# Altium PCB esp32c3phils.PcbDoc (part 2 of 3)
Units mil, origin at the board's own origin, x right, y up, seen from the top; angles counter-clockwise.
Board outline 2756.04 x 1955.51 mil, 6 copper layers (Top Layer, Layer 1, Layer 3, Layer 4, Layer 2, Bottom Layer), stack 54.512 mil thick; 66 components, 48 nets, 263 pads, 93 vias.
Unrouted connection lines stored in the file: 25.
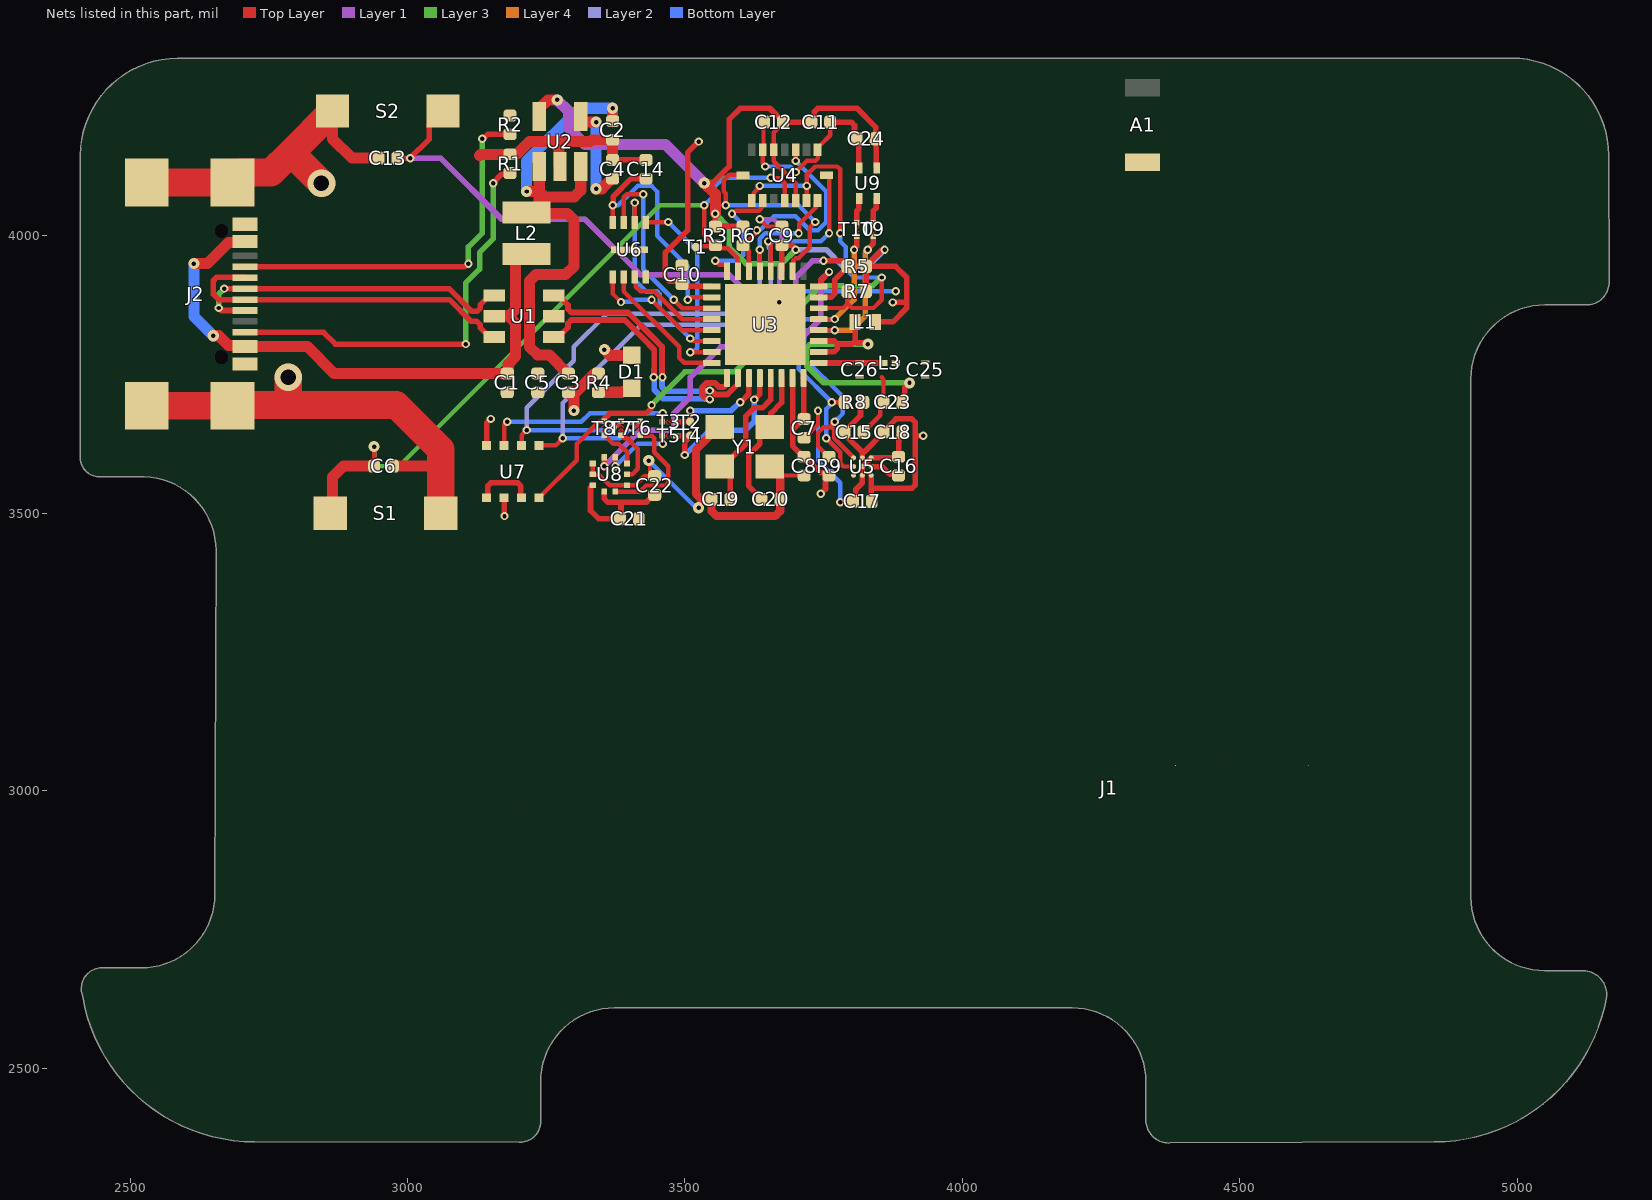
[diagram p6: the nets of this part, all layers, seen from the top]

## Part data
A1: library part AMCA31-2R450G-S1F-T3, "Chip Dielectric Antenna; 1dBi; 2450MHz; T/R", Case/Package=SMD/SMT, Frequency=2.45GHz, Manufacturer=Abracon, Max Power Dissipation=3W, Package Quantity=3000, Supplier Part Number 1=535-14095-1-ND, Bandwidth=90MHz, Category="RF Antennas", ComponentLink1Description=https://datasheet.ciiva.com/29647/amca31-2r450g-s1f-t-29647350.pdf?src-supplier=Digikey, ComponentLink1URL=https://datasheet.ciiva.com/29647/amca31-2r450g-s1f-t-29647350.pdf?src-supplier=Digikey, Height=0.047inch, Impedance=50R, Manufacturer Part Number=AMCA31-2R450G-S1F-T3, Max Frequency=2.45GHz, Mount="Surface Mount", Number of Bands=1, Packaging="Tape and Reel", Power Rating=3W, Pricing 1="1=0.31, 10=0.217, 25=0.1924, 100=0.1875, 250=0.18412, 500=0.17502, 1000=0.15693 (USD)", RoHS=Yes, RoHS Compliant=Yes, Series=AMCA, Stock 1=40750, Supplier 1=Digikey, Termination=Solder, VSWR=2
C1 C2 C4 C6 C7 C8 C9 C10 C11 C12 C13 C15 C17 C18 C21 C22: library part CC0402KRX7R7BB104, "Multilayer Ceramic Capacitor, 0.1 uF, 16 V, ï¿½ 10%, X7R, 0402 [1005 Metric]", Capacitance=100nF, Case Code (Imperial)=0402, Case Code (Metric)=1005, Dielectric=X7R, LCSC=C60474, Manufacturer=Yageo, Max Operating Temperature=125°C, Min Operating Temperature=-55°C, Package Quantity=1, Supplier Part Number 1=311-1338-1-ND, Temperature Coefficient=30ppm/°C, Tolerance=10%, Voltage=16V, Case/Package=0402, Category="Ceramic Capacitors", ComponentLink1Description=https://datasheet.ciiva.com/11788/0900766b80ce67ed-11788364.pdf?src-supplier=Rs, ComponentLink1URL=https://datasheet.ciiva.com/11788/0900766b80ce67ed-11788364.pdf?src-supplier=Rs, ComponentLink2Description=https://datasheet.ciiva.com/7978/1489800-7978111.pdf?src-supplier=Element14, ComponentLink2URL=https://datasheet.ciiva.com/7978/1489800-7978111.pdf?src-supplier=Element14, ComponentLink3Description=https://datasheet.ciiva.com/161/mlccorderingcode-161545.pdf?src-supplier=Digikey, ComponentLink3URL=https://datasheet.ciiva.com/161/mlccorderingcode-161545.pdf?src-supplier=Digikey, ComponentLink4Description=https://datasheet.ciiva.com/161/mlccorderingcode-161544.pdf?src-supplier=Digikey, ComponentLink4URL=https://datasheet.ciiva.com/161/mlccorderingcode-161544.pdf?src-supplier=Digikey, ComponentLink5Description=https://datasheet.ciiva.com/161/mlccorderingcode-161546.pdf?src-supplier=Digikey, ComponentLink5URL=https://datasheet.ciiva.com/161/mlccorderingcode-161546.pdf?src-supplier=Digikey, ComponentLink6Description=https://datasheet.ciiva.com/8033/1734573-8033661.pdf?src-supplier=Element14, ComponentLink6URL=https://datasheet.ciiva.com/8033/1734573-8033661.pdf?src-supplier=Element14, ComponentLink7Description=https://datasheet.ciiva.com/11587/upy-gphc-x7r-6-3v-to-50v-8-11587305.pdf?src-supplier=Avnet, ComponentLink7URL=https://datasheet.ciiva.com/11587/upy-gphc-x7r-6-3v-to-50v-8-11587305.pdf?src-supplier=Avnet, Depth=0.5mm, Halogen Free=5694HalogenFree, Height=0.5mm, Lead Free=5697LeadFree, Length=1mm, Manufacturer Part Number=CC0402KRX7R7BB104, Material=4241ConductorMaterial, Mount="Surface Mount", Number of Pins=2, Packaging="Tape and Reel", Pricing 1="1=0.1, 10=0.024, 50=0.0164, 100=0.0139, 500=0.0098, 1000=0.00852, 2500=0.00718, 5000=0.00636 (USD)", Radiation Hardening=No, Reach SVHC Compliant=No, RoHS=Yes, RoHS Compliant=Yes, Series=CC, Stock 1=15609894, Supplier 1=Digikey, Termination=SMD/SMT, Thickness=0.022inch, Voltage Rating=16V, Voltage Rating (AC)=16V, Voltage Rating (DC)=16V, Width=0.02inch
C3 C5 C14 C23 C24: library part 0402ZD106MAT2A, "Multilayer Ceramic Chip Capacitor 0402 Size 10uF 10V X5R ±20% Tolerance SMD T/R", Capacitance=10uF, Case Code (Imperial)=0402, Case Code (Metric)=1005, Dielectric=X5R, Manufacturer="Kyocera AVX", Max Operating Temperature=85°C, Min Operating Temperature=-55°C, Supplier Part Number 1=478-KGM05CR51A106MHCT-ND, Tolerance=20%, Voltage Rating=10V, Case/Package=0402, Category="Ceramic Capacitors", ComponentLink1Description=http://catalogs.avx.com/SurfaceMount.pdf?src-supplier=Digikey, ComponentLink1URL=http://catalogs.avx.com/SurfaceMount.pdf?src-supplier=Digikey, ComponentLink2Description=http://datasheets.avx.com/cx5r.pdf?src-supplier=Digikey, ComponentLink2URL=http://datasheets.avx.com/cx5r.pdf?src-supplier=Digikey, ComponentLink3Description=https://datasheet.octopart.com/0402ZD106MAT2A-KYOCERA-AVX-datasheet-155912759.pdf?src-supplier=Future+Electronics, ComponentLink3URL=https://datasheet.octopart.com/0402ZD106MAT2A-KYOCERA-AVX-datasheet-155912759.pdf?src-supplier=Future+Electronics, ComponentLink4Description=https://www.farnell.com/datasheets/2260752.pdf?src-supplier=Newark, ComponentLink4URL=https://www.farnell.com/datasheets/2260752.pdf?src-supplier=Newark, ComponentLink5Description=https://datasheet.octopart.com/0402ZD106MAT2A-KYOCERA-AVX-datasheet-155912759.pdf?src-supplier=TME, ComponentLink5URL=https://datasheet.octopart.com/0402ZD106MAT2A-KYOCERA-AVX-datasheet-155912759.pdf?src-supplier=TME, Height=710um, Manufacturer Part Number=0402ZD106MAT2A, Material=4241ConductorMaterial, Mount="Surface Mount", Packaging="Cut Tape", Pricing 1="1=0.36, 10=0.212, 100=0.1271, 1000=0.0834, 2500=0.07583 (USD)", RoHS=Yes, RoHS Compliant=Yes, Series=-, Stock 1=61749, Supplier 1=Digikey, Voltage Rating (DC)=10V
C16: "Multilayer Ceramic Capacitor, 2.2 uF, 6.3 V, ï¿½ 20%, X5R, 0402 [1005 Metric]", Capacitance=2.2uF, Case Code (Imperial)=0402, Case Code (Metric)=1005, Dielectric=X5R, Manufacturer=Samsung, Manufacturer Part Number=CL05A225MQ5NNNC, Max Operating Temperature=85°C, Min Operating Temperature=-55°C, Supplier Part Number 1=1276-1469-1-ND, Tolerance=20%, Voltage Rating=6.3V, Case/Package=0402, Category="Ceramic Capacitors", ComponentLink1Description=https://datasheet.ciiva.com/25798/cl05a225mq5nnnc-25798545.pdf?src-supplier=Digikey, ComponentLink1URL=https://datasheet.ciiva.com/25798/cl05a225mq5nnnc-25798545.pdf?src-supplier=Digikey, ComponentLink2Description=https://datasheet.ciiva.com/16437/cl05a225mq5nnnc-16437362.pdf?src-supplier=Future+Electronics, ComponentLink2URL=https://datasheet.ciiva.com/16437/cl05a225mq5nnnc-16437362.pdf?src-supplier=Future+Electronics, Construction=Flat, Depth=0.5mm, Height=0.5mm, Length=1mm, Material=Ceramic, Mount="Surface Mount", Packaging="Tape and Reel", Pricing 1="1=0.08, 10=0.011, 100=0.0064, 1000=0.0048, 2500=0.0032 (USD)", Radiation Hardening=No, RoHS=Yes, RoHS Compliant=Yes, Series=CL, Stock 1=23507, Supplier 1=Digikey, Voltage Rating (DC)=6.3V
C19 C20: library part C10, "0402 10 pF 50 V ±5 % Tolerance NP0 SMT Multilayer Ceramic Capacitor", Capacitance=10pF, Case Code (Imperial)=0402, Case Code (Metric)=1005, Dielectric=C0G, Dielectric Material=4241ConductorMaterial, Insulation Resistance=100GR, Manufacturer=Yageo, Manufacturer Part Number=CC0402JRNPO9BN100, Max Operating Temperature=125°C, Min Operating Temperature=-55°C, Package Quantity=1, Supplier Part Number 1=311-1014-1-ND, Temperature Coefficient=30ppm/°C, Tolerance=5%, Voltage=50V, Case/Package=0402, Category="Ceramic Capacitors", ComponentLink1Description=https://datasheet.ciiva.com/11786/0900766b8079c870-11786158.pdf?src-supplier=Rs, ComponentLink1URL=https://datasheet.ciiva.com/11786/0900766b8079c870-11786158.pdf?src-supplier=Rs, ComponentLink2Description=https://datasheet.ciiva.com/143/mlccorderingcode-143992.pdf?src-supplier=Digikey, ComponentLink2URL=https://datasheet.ciiva.com/143/mlccorderingcode-143992.pdf?src-supplier=Digikey, ComponentLink3Description=https://datasheet.ciiva.com/143/mlccorderingcode-143993.pdf?src-supplier=Digikey, ComponentLink3URL=https://datasheet.ciiva.com/143/mlccorderingcode-143993.pdf?src-supplier=Digikey, ComponentLink4Description=https://datasheet.ciiva.com/143/mlccorderingcode-143994.pdf?src-supplier=Digikey, ComponentLink4URL=https://datasheet.ciiva.com/143/mlccorderingcode-143994.pdf?src-supplier=Digikey, ComponentLink5Description=https://datasheet.ciiva.com/8033/1443161-8033591.pdf?src-supplier=Element14, ComponentLink5URL=https://datasheet.ciiva.com/8033/1443161-8033591.pdf?src-supplier=Element14, ComponentLink6Description=https://datasheet.ciiva.com/8033/1443161-8033593.pdf?src-supplier=Element14, ComponentLink6URL=https://datasheet.ciiva.com/8033/1443161-8033593.pdf?src-supplier=Element14, ComponentLink7Description=https://datasheet.ciiva.com/8033/1443161-8033596.pdf?src-supplier=Element14, ComponentLink7URL=https://datasheet.ciiva.com/8033/1443161-8033596.pdf?src-supplier=Element14, ComponentLink8Description=https://datasheet.ciiva.com/28450/1443161-28450213.pdf?src-supplier=Element14, ComponentLink8URL=https://datasheet.ciiva.com/28450/1443161-28450213.pdf?src-supplier=Element14, ComponentLink9Description=https://datasheet.ciiva.com/5427/upy-gp-np0-16v-to-50v-8-5427741.pdf?src-supplier=Mouser, ComponentLink9URL=https://datasheet.ciiva.com/5427/upy-gp-np0-16v-to-50v-8-5427741.pdf?src-supplier=Mouser, Depth=0.5mm, Halogen Free=5694HalogenFree, Height=0.5mm, Lead Free="Lead Free", Length=1mm, Mount="Surface Mount", Number of Pins=2, Packaging="Tape and Reel", Pricing 1="1=0.1, 10=0.024, 100=0.0133, 1000=0.00812, 2500=0.00685, 5000=0.00609 (USD)", Radiation Hardening=No, Reach SVHC Compliant=No, RoHS=Yes, RoHS Compliant=Yes, Series=CC, Stock 1=1109319, Supplier 1=Digikey, Termination=SMD/SMT, Thickness=0.022inch, Voltage Rating=50V, Voltage Rating (AC)=50V, Voltage Rating (DC)=50V, Width=0.02inch
C25 C26: library part 3.3PF0201, "Multilayer Ceramic Capacitor, 3.3 pF, 25 V, ± 0.1pF, C0G (NP0), 0201 [0603 Metric]", Capacitance=3.3pF, Case Code (Imperial)=0201, Case Code (Metric)=0603, Dielectric=C0G, Manufacturer=Murata, Max Operating Temperature=125°C, Min Operating Temperature=-55°C, Package Quantity=15000, Supplier Part Number 1=490-11296-1-ND, Voltage Rating=25V, Case/Package=0201, Category="Ceramic Capacitors", ComponentLink1Description=https://datasheet.ciiva.com/29538/grm0335c1e3r3ba01-01-29538647.pdf?src-supplier=Digikey, ComponentLink1URL=https://datasheet.ciiva.com/29538/grm0335c1e3r3ba01-01-29538647.pdf?src-supplier=Digikey, Height=0.3mm, Length=0.024inch, Manufacturer Part Number=GRM0335C1E3R3BA01D, Mount="Surface Mount", Packaging="Tape and Reel", Pricing 1="1=0.1, 10=0.018, 100=0.0098, 1000=0.00587, 2500=0.00466, 5000=0.0039 (USD)", RoHS=Yes, RoHS Compliant=Yes, Series=GRM, Stock 1=342640, Supplier 1=Digikey, Termination=SMD/SMT, Thickness=0.013inch, Voltage Rating (DC)=25V, Width=0.012inch
D1: library part LTST-C190KFKT, "Single Color LED, Ultra Bright Orange, Water Clear, 1.1mm", Case Code (Imperial)=0603, Case Code (Metric)=1608, Color=Orange, Forward Current=30mA, Forward Voltage=2V, Lens Color=Colorless, Manufacturer="Vishay Lite-On", Max Operating Temperature=85°C, Min Operating Temperature=-55°C, Package Quantity=3000, Power Dissipation=75mW, Resistance=47kR, Reverse Voltage=5V, Supplier Part Number 1=160-1434-1-ND, Test Current=20mA, Tolerance=1%, Voltage Rating=50V, Case/Package=0603, Category=LEDs, ComponentLink1Description=https://datasheet.ciiva.com/11774/0900766b80dc02a7-11774744.pdf?src-supplier=Rs, ComponentLink1URL=https://datasheet.ciiva.com/11774/0900766b80dc02a7-11774744.pdf?src-supplier=Rs, ComponentLink2Description=https://datasheet.ciiva.com/15201/getdatasheetpartid-309341-15201388.pdf?src-supplier=Verical, ComponentLink2URL=https://datasheet.ciiva.com/15201/getdatasheetpartid-309341-15201388.pdf?src-supplier=Verical, ComponentLink3Description=https://datasheet.ciiva.com/16396/lite-on20ltst-c190kfkt-16396246.pdf?src-supplier=Future+Electronics, ComponentLink3URL=https://datasheet.ciiva.com/16396/lite-on20ltst-c190kfkt-16396246.pdf?src-supplier=Future+Electronics, ComponentLink4Description=https://datasheet.ciiva.com/12400/100-ltst-c190kfkt-53640-12400769.pdf?src-supplier=Mouser, ComponentLink4URL=https://datasheet.ciiva.com/12400/100-ltst-c190kfkt-53640-12400769.pdf?src-supplier=Mouser, ComponentLink5Description=https://datasheet.ciiva.com/2109/s-110-ltst-c190kfkt-2109976.pdf?src-supplier=Digikey, ComponentLink5URL=https://datasheet.ciiva.com/2109/s-110-ltst-c190kfkt-2109976.pdf?src-supplier=Digikey, ComponentLink6Description=https://datasheet.ciiva.com/2109/s-110-ltst-c190kfkt-2109977.pdf?src-supplier=Digikey, ComponentLink6URL=https://datasheet.ciiva.com/2109/s-110-ltst-c190kfkt-2109977.pdf?src-supplier=Digikey, ComponentLink7Description=https://datasheet.ciiva.com/2109/s-110-ltst-c190kfkt-2109978.pdf?src-supplier=Digikey, ComponentLink7URL=https://datasheet.ciiva.com/2109/s-110-ltst-c190kfkt-2109978.pdf?src-supplier=Digikey, Depth=1.6mm, Dominant Wavelength=605nm, Height=0.9mm, Illumination Color=Orange, Lead Free="Lead Free", Length=3.2mm, Lens Size=0.8mm, Lens Style=Flat,Diffused,Colorless,Rectangular,Clear, Lens Transparency=Clear, Luminous Intensity=90mcd, Manufacturer Part Number=LTST-C190KFKT, Mount="Surface Mount", Number of Elements=1, Number of LEDs=1, Number of Pins=2, Packaging="Tape and Reel", Power Rating=75mW, Pricing 1="1=0.13, 10=0.089, 100=0.0613, 500=0.0484, 1000=0.0441, 2000=0.04042 (USD)", Radiation Hardening=No, Reach SVHC Compliant=4186SVHC, RoHS=Yes, RoHS Compliant=Yes, Series=-, Stock 1=96032, Supplier 1=Digikey, Viewing Angle=130°, Voltage Rating (DC)=50V, Wavelength=605nm, Width=0.8mm
J1 J3: Package=None, Availability=Unavailable, MF="{'manufacturer': u'Adam Tech'}", MP=PH2-20-UA, Price=None
J2: library part USB4110-GF-A, "USB Connector, 16 Contact(s), Male, Right Angle, Surface Mount Terminal, Locking, Receptacle", Manufacturer="Global Connector Technology", Supplier Part Number 1=2073-USB4110-GF-A-1-ND, Voltage Rating=20V, Category="USB Connectors", ComponentLink1Description=https://gct.co/files/drawings/usb4110.pdf?src-supplier=Digikey, ComponentLink1URL=https://gct.co/files/drawings/usb4110.pdf?src-supplier=Digikey, Contact Material=153,157ConductorMaterial, Height=3.46mm, LCSC=USB4110-GF-A, Manufacturer Part Number=USB4110-GF-A, Number of Contacts=16NUMBER, Number of Pins=16NUMBER, Orientation=5496OrientationType, Pricing 1="1=1.64, 10=1.244, 25=1.1176, 50=1.032, 100=0.9547, 250=0.86368, 500=0.80254 (USD)", RoHS=No, Stock 1=30215, Supplier 1=Digikey, USB Standard=6108USBStandard
L1: "Inductor with Inductance: 2.2nH Tol. +/-0.1nH, Package: 0402 (1005)", Package="1006 Murata", Availability=Good, Check_prices=https://www.snapeda.com/parts/LQW15AN2N2B80D/Murata%20Electronics%20North%20America/view-part/1522880/?ref=eda, MF="Murata Electronics", MP=LQW15AN2N2B80D, Price=None, Purchase-URL=https://pricing.snapeda.com/search/part/LQW15AN2N2B80D/?ref=eda, SnapEDA_Link=https://www.snapeda.com/parts/LQW15AN2N2B80D/Murata%20Electronics%20North%20America/view-part/1522880/?ref=snap
L2: "Fixed Ind 2.220%UH 0.114 Ohm 1800", Manufacturer=Sunlord, Supplier Part Number 1=3442-SPH252010H2R2MTCT-ND, Category="Fixed Inductors", Manufacturer Part Number=SPH252010H2R2MT, Pricing 1="1=0.27, 10=0.207, 25=0.1872, 50=0.1736, 100=0.1609, 250=0.14548, 500=0.13478, 1000=0.125 (USD)", RoHS=Yes, RoHS Compliant=Yes, Stock 1=1953, Supplier 1=Digikey
L3: library part MLG0603P2N2BT000, "Inductor High Frequency Chip Unshielded Multi-Layer 2.2nH 0.1nH 500MHz 14Q-Factor Ceramic 600mA 100mOhm DCR 0201 T/R", Case/Package=0201, DC Resistance (DCR)=100mR, Inductance=2.2nH, Manufacturer=TDK, Max Operating Temperature=125°C, Min Operating Temperature=-55°C, Self Resonant Frequency=7.5GHz, Supplier Part Number 1=445-MLG0603P2N2BT000CT-ND, Test Frequency=500MHz, Category="Fixed Inductors", ComponentLink1Description=https://product.tdk.com/info/en/catalog/datasheets/inductor_commercial_high-frequency_mlg0603p_en.pdf?ref_disty=digikey&src-supplier=Digikey, ComponentLink1URL=https://product.tdk.com/info/en/catalog/datasheets/inductor_commercial_high-frequency_mlg0603p_en.pdf?ref_disty=digikey&src-supplier=Digikey, Core Material=Non-Magnetic, Manufacturer Part Number=MLG0603P2N2BT000, Mount="Surface Mount", Packaging="Tape and Reel", Pricing 1="1=0.1, 10=0.028, 100=0.0229, 1000=0.01879, 5000=0.01639 (USD)", RoHS=Yes, RoHS Compliant=Yes, Series=MLG-P, Shielding=Unshielded, Stock 1=6974, Supplier 1=Digikey
R1 R2 R3 R5 R6 R7 R8 R9: library part RC0402FR-075K1L, "SMD Chip Resistor, 5.1 kOhm, ï¿½ 1%, 62.5 mW, 0402 [1005 Metric], Thick Film, General Purpose", Case Code (Imperial)=0402, Case Code (Metric)=1005, LCSC=C105872, Manufacturer=Yageo, Max Operating Temperature=155°C, Max Power Dissipation=63mW, Min Operating Temperature=-55°C, Package Quantity=1, Resistance=5.1kR, Resistance Tolerance=1%, Resistor Type="Thick Film", Supplier Part Number 1=311-5.10KLRCT-ND, Temperature Coefficient=100ppm/°C, Voltage Rating=50V, Case/Package=0402, Category="Chip SMD Resistors", Construction=Rectangular, Depth=0.5mm, Features="Moisture Resistant", Height=0.016inch, Lead Free=5697LeadFree, Length=1mm, Manufacturer Part Number=RC0402FR-075K1L, Military Standard=Not, Number of Terminations=2, Packaging="Tape and Reel", Power Rating=63mW, Pricing 1="1=0.1, 10=0.009, 50=0.0072, 100=0.0041, 500=0.00306 (USD)", Reach SVHC Compliant=Unknown, RoHS=Yes, RoHS Compliant=Yes, Series=RC, Stock 1=868211, Supplier 1=Digikey, Technology="THICK FILM", Termination=SMD/SMT, Tolerance=1%, Voltage Rating (DC)=50V, Width=0.02inch, Working Voltage=50V
R4: library part 2K2, "Res Thin Film 0402 2K Ohm 0.1% 0.063W ±25ppm/°C Molded SMD Punched Carrier T/R", Case Code (Imperial)=0402, Case Code (Metric)=1005, Manufacturer=Panasonic, Max Operating Temperature=155°C, Max Power Dissipation=63mW, Min Operating Temperature=-55°C, Package Quantity=1, Resistance=2kR, Resistance Tolerance=0.1%, Resistor Type="Thin Film,Metal Film", Supplier Part Number 1=P2.0KDCCT-ND, Temperature Coefficient=25ppm/°C, Voltage Rating=25V, Case/Package=0402, Category="Chip SMD Resistors", ComponentLink1Description=https://datasheet.ciiva.com/43470/1776116-43470486.pdf?src-supplier=Farnell, ComponentLink1URL=https://datasheet.ciiva.com/43470/1776116-43470486.pdf?src-supplier=Farnell, ComponentLink2Description=https://datasheet.ciiva.com/9116/aoa0000ce26-9116653.pdf?src-supplier=Avnet, ComponentLink2URL=https://datasheet.ciiva.com/9116/aoa0000ce26-9116653.pdf?src-supplier=Avnet, ComponentLink3Description=https://datasheet.ciiva.com/9197/aoa0000ce26-9197535.pdf?src-supplier=Avnet, ComponentLink3URL=https://datasheet.ciiva.com/9197/aoa0000ce26-9197535.pdf?src-supplier=Avnet, Contact Plating=Tin, Depth=0.5mm, Features="Automotive AEC-Q200", Height=0.35mm, Lead Free="Lead Free", Length=1mm, Manufacturer Part Number=ERA-2AEB202X, Mount="Surface Mount", Number of Terminations=2, Packaging="Tape and Reel", Power Rating=63mW, Pricing 1="1=0.1, 10=0.082, 50=0.0716, 100=0.0677, 500=0.05944, 1000=0.05637, 5000=0.05032 (USD)", Radiation Hardening=No, Reach SVHC Compliant=No, RoHS=Yes, RoHS Compliant=Yes, Series=ERA-2A, Size Code=0402, Stock 1=90625, Supplier 1=Digikey, Technology="THIN FILM", Termination=SMD/SMT, Tolerance=0.1%, Width=0.5mm
S1 S2: "Switch Tactile N.O. SPST Round Button Gull Wing 0.05A 12VDC 0.98N SMD T/R", Manufacturer="Alps Electric", Manufacturer Part Number=SKRKAHE020, Supplier Part Number 1=4809-SKRKAHE020CT-ND, Category="Tactile Switches", ComponentLink1Description=http://datasheet.octopart.com/SKRKAHE020-ALPS-datasheet-41327033.pdf?src-supplier=Farnell, ComponentLink1URL=http://datasheet.octopart.com/SKRKAHE020-ALPS-datasheet-41327033.pdf?src-supplier=Farnell, ComponentLink2Description=http://datasheet.octopart.com/SKRKAHE020-ALPS-datasheet-41327033.pdf?src-supplier=Avnet, ComponentLink2URL=http://datasheet.octopart.com/SKRKAHE020-ALPS-datasheet-41327033.pdf?src-supplier=Avnet, ComponentLink3Description=http://datasheet.octopart.com/SKRKAHE020-ALPS-datasheet-41327033.pdf?src-supplier=Onlinecomponents.com, ComponentLink3URL=http://datasheet.octopart.com/SKRKAHE020-ALPS-datasheet-41327033.pdf?src-supplier=Onlinecomponents.com, ComponentLink4Description=http://datasheet.octopart.com/SKRKAHE020-ALPS-datasheet-41327033.pdf?src-supplier=Verical, ComponentLink4URL=http://datasheet.octopart.com/SKRKAHE020-ALPS-datasheet-41327033.pdf?src-supplier=Verical, ComponentLink5Description=http://datasheet.octopart.com/SKRKAHE020-ALPS-datasheet-41327033.pdf?src-supplier=Future+Electronics, ComponentLink5URL=http://datasheet.octopart.com/SKRKAHE020-ALPS-datasheet-41327033.pdf?src-supplier=Future+Electronics, ComponentLink6Description=https://datasheet.octopart.com/SKRKAHE020-ALPS-datasheet-156009340.pdf?src-supplier=Electro+Sonic, ComponentLink6URL=https://datasheet.octopart.com/SKRKAHE020-ALPS-datasheet-156009340.pdf?src-supplier=Electro+Sonic, ComponentLink7Description=http://datasheet.octopart.com/SKRKAHE020-ALPS-datasheet-41327033.pdf?src-supplier=Quest, ComponentLink7URL=http://datasheet.octopart.com/SKRKAHE020-ALPS-datasheet-41327033.pdf?src-supplier=Quest, ComponentLink8Description=https://datasheet.octopart.com/SKRKAHE020-ALPS-datasheet-41327033.pdf?src-supplier=Master+Electronics, ComponentLink8URL=https://datasheet.octopart.com/SKRKAHE020-ALPS-datasheet-41327033.pdf?src-supplier=Master+Electronics, Pricing 1="1=0.41, 10=0.351, 25=0.3276, 100=0.2931, 250=0.27156, 500=0.2563, 1000=0.24208 (USD)", RoHS=Yes, RoHS Compliant=Yes, Stock 1=19659, Supplier 1=Digikey
U1: library part USBLC6-2SC6, "ESD Suppressor Diode Array Dual Uni-Dir 15kV Air Gap/15kV Contact Disc 6-Pin SOT-23 T/R", Breakdown Voltage=6V, Capacitance=3.5pF, Case/Package=SOT-23, Clamping Voltage=17V, LCSC=C5250994, Leakage Current=150nA, Manufacturer=STMicroelectronics, Max Operating Temperature=125°C, Max Repetitive Reverse Voltage (Vrrm)=5.25V, Min Operating Temperature=-40°C, Operating Supply Voltage=1.1V, Package Quantity=3000, Peak Pulse Current=5A, Power Line Protection=Yes, Supplier Part Number 1=497-5235-1-ND, Test Current=1mA, Working Voltage=5V, Category="TVS Diodes", Clamping Voltage-Max=17V, ComponentLink1Description=https://datasheet.ciiva.com/1268/1690354-1268384.pdf?src-supplier=Element14, ComponentLink1URL=https://datasheet.ciiva.com/1268/1690354-1268384.pdf?src-supplier=Element14, ComponentLink2Description=https://datasheet.ciiva.com/4508/cd00050750-113117-4508433.pdf?src-supplier=Mouser, ComponentLink2URL=https://datasheet.ciiva.com/4508/cd00050750-113117-4508433.pdf?src-supplier=Mouser, ComponentLink3Description=https://datasheet.ciiva.com/41444/001184109-da-01-en-ic-esd-protecti-usblc6-2sc6-sot-23-6-stm-41444156.pdf?src-supplier=Conrad, ComponentLink3URL=https://datasheet.ciiva.com/41444/001184109-da-01-en-ic-esd-protecti-usblc6-2sc6-sot-23-6-stm-41444156.pdf?src-supplier=Conrad, Data Rate=480Mbps, Depth=1.75mm, Direction=Unidirectional,Bidirectional, ESD Protection=Yes, Height=1.3mm, Lead Free="Lead Free", Length=3.05mm, Manufacturer Part Number=USBLC6-2SC6, Max Breakdown Voltage=6V, Max Reverse Leakage Current=150nA, Min Breakdown Voltage=6V, Mount="Surface Mount", Number of Bidirectional Channels=2, Number of Channels=2, Number of Elements=1, Number of Pins=6, Packaging="Tape and Reel", Polarity=Unidirectional,Bidirectional, Pricing 1="1=0.36, 10=0.243, 100=0.163, 500=0.127, 1000=0.114, 3000=0.09, 6000=0.084, 9000=0.078, 15000=0.077, 21000=0.0755, 30000=0.075 (USD)", Radiation Hardening=No, Reach SVHC Compliant=No, Reverse Breakdown Voltage=6V, Reverse Standoff Voltage=5.25V, RoHS=Yes, RoHS Compliant=Yes, Series=USB, Stock 1=85420, Supplier 1=Digikey, Termination=SMD/SMT, Width=1.75mm
U2: "Linear Voltage Regulator IC Positive Fixed 1 Output 500mA SOT-23-5", Package="SOT-23-5 Exar", Check_prices=https://www.snapeda.com/parts/SPX3819M5-L-3-3/TR/MaxLinear%252C+Inc./view-part/?ref=eda, Manufacturer Part Number=SPX3819M5-L-3-3, MF="MaxLinear, Inc.", MP=SPX3819M5-L-3-3/TR, SnapEDA_Link=https://www.snapeda.com/parts/SPX3819M5-L-3-3/TR/MaxLinear%252C+Inc./view-part/?ref=snap
U3: "WiFi Modules (802.11) (Engineering Samples Only) SMD IC ESP32-C3, RISC-V single-core MCU, 2.4G Wi-Fi & BLE 5.0 combo, QFN 32-pin, 5*5 mm, 40 ~ 105C", Manufacturer Part Number=1904-ESP32-C3TR-ND, Package="VFQFN-32 Espressif Systems", Check_prices=https://www.snapeda.com/parts/ESP32-C3/Espressif+Systems/view-part/?ref=eda, MF="Espressif Systems", MP=ESP32-C3, SnapEDA_Link=https://www.snapeda.com/parts/ESP32-C3/Espressif+Systems/view-part/?ref=snap
U4: "High-performance 6-axis inertial sensor (accelerometer + gyroscope) <a href=\"https://pricing.snapeda.com/parts/BMI088/Bosch%20Sensortec/view-part?ref=eda\">Check prices</a>", Package=None, Availability=Unavailable, MP=BMI088, Price=None
U5 U8: "No Description Available", Mfr_Name="Bosch Sensortec", RefDes=RefDes
  U5: Type="Magnetic Sensors"
  U8: Type=Type
U6: "NOR Flash Serial (SPI, Dual SPI, Quad SPI) 3V/3.3V 16M-bit 2M x 8 6ns 8-Pin USON EP T/R", Package="UFDFN-8 Winbond", Availability="In Stock", Check_prices=https://www.snapeda.com/parts/W25Q16JVUXIQ%20TR/Winbond/view-part/?ref=eda, MF=Winbond, MP="W25Q16JVUXIQ TR", Price=None, Purchase-URL="https://pricing.snapeda.com/search/part/W25Q16JVUXIQ TR/?ref=eda", SnapEDA_Link=https://www.snapeda.com/parts/W25Q16JVUXIQ%20TR/Winbond/view-part/?ref=snap
U7: "Gas sensor measuring relative humidity, barometric pressure, ambient temperature and gas (VOC)", Package=None, Availability=Unavailable, MP=BME688, Price=None
U9: "Digital Relative Humidity Temperature Sensor, Â±1.0 %RH, Â±0.1 Â°C, Ultra-Low-Power, with filtermembrane", Package=Package, Availability="In Stock", Check_prices=https://www.snapeda.com/parts/SHT45-AD1B-R3/Sensirion/view-part/?ref=eda, MF=Sensirion, MP=SHT45-AD1B-R3, Price=None, Purchase-URL=https://pricing.snapeda.com/search/part/SHT45-AD1B-R3/?ref=eda, SnapEDA_Link=https://www.snapeda.com/parts/SHT45-AD1B-R3/Sensirion/view-part/?ref=snap
Y1: library part ECS-400-18-33-JGN-TR3, Package=None, Availability=Unavailable, MF="{'manufacturer': u'ECS Inc.'}", MP=ECS-400-18-33-JGN-TR3, Price=None

## Via types
v1: diameter 15, hole 8, Top Layer to Bottom Layer, 76 vias
v2: diameter 20, hole 8, Top Layer to Bottom Layer, 15 vias
v3: diameter 50, hole 28, Top Layer to Bottom Layer, 2 vias

## Nets (pads, with @x,y where several pads share a name; then routed paths per layer and width w, separated by ;. In a path a pad name is that pad's centre, name@x,y a point inside that pad or via, vN(x,y) a via of type N, cw(c..) or ccw(c..) an arc to the next point about the centre after c; other vN are vias at no path point)
+3V3: C5.1 C7.2 C8.2 C9.2 C10.2 C11.2 C12.2 C15.1 C17.1 C18.1 C24.1 D1.A L1.2 R3.1 R5.1 R6.1 R7.1 R8.1 R9.1 U2.5 U3.11 U3.17 U3.31 U3.32 U4.3 U4.11 U5.B3 U5.C1 U7.6 U7.8 U9.3 | length 3399.5
  Top Layer w8: C12.2@3676.93,4205 3676.93,4202.93 3660.32,4186.32 U4.3@3660.32,4155.21 3660.32,4134.69 3699.68,4095.32 U4.11@3699.68,4063.47
  Top Layer w10: U7.8@3142.76,3527.76 3145,3530 3145,3549.14 3150.86,3555 3198.51,3555 3204.37,3549.14 3204.37,3529.13 U7.6@3205.75,3527.76 ; v1(3525,4170) 3505,4150 3505,4010 3465,3970 3465,3925 3471.69,3918.31 3489.76,3918.31 C10.2@3495,3913.07 3498.86,3909.21 3548.43,3909.21 U3.17@3548.74,3908.9 ; v2(3535,4095) 3536.91,4096.91 3551.91,4096.91 3580,4125 3580,4210 3600,4230 3653.11,4230 3676.93,4206.18 C12.2@3676.93,4205 C11.2@3728.07,4205 3733.31,4210.24 3733.31,4223.31 3740,4230 3810,4230 3843.86,4196.14 C24.1@3843.86,4175 3844.84,4174.02 3844.84,4123.46 U9.3@3845.75,4122.56 ; v1(3555,4040) R3.1@3555,4016.93 R6.1@3605,4016.93 ; U3.11@3674.53,3936.26 3674.76,3936.5 3674.76,3982.83 C9.2@3675,3983.07 3694.14,3983.07 3694.14,3982.21 3700,3976.35 v1(3700,3975) ; U3.31@3694.21,3743.74 3694.21,3650.39 ; U3.32@3713.9,3743.74 3714.21,3743.43 C7.2@3714.21,3670.79 ; C7.2@3715,3670 3713.82,3670 3694.21,3650.39 ; v1(3745,3535) 3753.58,3543.58 3753.58,3562.49 3759.16,3568.07 R9.1@3760,3568.07 3754.76,3573.31 3744.8,3573.31 3716.18,3601.93 C8.2@3715,3601.93 3713.82,3601.93 3694.21,3621.54 3694.21,3650.39 ; C15.1@3788.07,3646.38 3788.07,3647.56 3816.69,3676.18 3816.69,3694.76 R8.1@3821.93,3700 ; C15.1@3790.56,3639.44 3820,3610 ; U5.B3@3820,3600 3820,3610 ; R7.1@3826.93,3900 R5.1@3826.93,3945 ; C17.1@3835.75,3521.38 3835.75,3544.94 ; U5.C1@3835.75,3568.5 3835.75,3544.94 ; L1.2@3843.11,3845 3875,3845 3900,3870 3900,3880 ; v1(3860,3975) 3859.04,3974.04 3854.79,3974.04 3826.93,3946.18 R5.1@3826.93,3945 ; v1(3875,3880) 3900,3880 ; v1(3930,3640) 3915,3640 ; 3820,3610 3822.88,3610 3858.07,3645.19 C18.1@3858.07,3646.38 3858.07,3647.56 3880.51,3670 3909.14,3670 3915,3664.14 3915,3640 ; R5.1@3826.93,3945 3880,3945 3900,3925 3900,3880 ; 3835.75,3544.94 3835.81,3545 3909.14,3545 3915,3550.86 3915,3640
  Top Layer w20: U2.5@3237.6,4215.28 3237.6,4229.45 3253.15,4245 v2(3270,4245) ; v2(3355,3795) 3365.47,3784.53 D1.A@3404.25,3784.53 ; v2(3535,4095) 3555,4075 v1(3555,4040)
  Layer 1 w20: v2(3270,4245) 3290,4225 3290,4195 3320,4165 3465,4165 v2(3535,4095)
  Layer 3 w10: v1(3555,4040) 3580,4015 3580,3980 3610,3950 3675,3950 v1(3700,3975)
  Layer 2 w10: v1(3700,3975) 3755,3975 3785,3945 3830,3945 v1(3860,3975)
ACC_INT: U3.10 U4.16 | length 368
  Top Layer w8: v1(3573.5,4055) 3573.5,4076.7 3570,4080.2 3570,4100 3580,4110 3603.95,4110 U4.16@3604.61,4109.34 ; U3.10@3694.21,3936.26 3695.53,3937.57 3695.53,3955.31 3700.21,3960 3705.31,3960 3710,3964.69 3710,3965 3725,3980 3725,4015 v1(3735,4025)
  Bottom Layer w8: v1(3573.5,4055) 3705,4055 v1(3735,4025)
ANT_IN: A1.1 C25.2 L3.1
AVDD: C23.1 L1.1 U3.2 U3.3 | length 559.4
  Top Layer w10: U3.3@3741.26,3810.47 3769.53,3810.47 3775,3805 ; U3.2@3741.57,3790.47 U3.2@3741.26,3790.79 3769.14,3790.79 3775,3796.65 3775,3805 ; L1.1@3806.89,3845 3806.89,3810.86 ; v2(3830,3805) 3828.09,3806.91 3810.83,3806.91 3806.89,3810.86 ; C23.1@3891.93,3700 3896.81,3704.88 3896.81,3726.81 v2(3905,3735) ; 3775,3805 3801.03,3805 3806.89,3810.86
  Layer 3 w10: v2(3830,3805) 3725.86,3805 3720,3799.14 3720,3765 3750,3735 v2(3905,3735)
BOOT_GYR_INT: C6.1 R3.2 S1.1 T1.1 U3.15 U4.12 | length 1407.8
  Top Layer w8: C6.1@2940,3585 v2(2940,3620) ; T1.1@3520,3980 3521.34,3981.34 3553.27,3981.34 R3.2@3555,3983.07 ; v1(3535,4055) 3535,4001.89 3553.82,3983.07 R3.2@3555,3983.07 ; U3.15@3595.79,3936.26 3594.47,3937.57 3594.47,3960.53 3577.55,3977.45 3560.62,3977.45 R3.2@3555,3983.07 ; v1(3655,4105) 3656.34,4103.66 3671.34,4103.66 3680,4095 U4.12@3680,4063.47
  Top Layer w20: S1.1@2861,3500 2865,3504 2865,3565 2885,3585 C6.1@2940,3585
  Layer 3 w8: v2(2940,3620) 2940,3589.69 2944.69,3585 2985,3585 3455,4055 v1(3535,4055)
  Bottom Layer w8: v1(3535,4055) 3550,4070 3550,4085 3570,4105 v1(3655,4105)
CC1: J2.A5 R2.1 | length 693.8
  Top Layer w10: J2.A5@2707.32,3944.21 3102.86,3944.21 3108.65,3950 v1(3110,3950) ; v1(3135,4175) 3136.35,4175 3144.42,4183.07 R2.1@3185,4183.07
  Layer 3 w10: v1(3110,3950) 3110,3980 3135,4005 v1(3135,4175)
CC2: J2.B5 R1.1 | length 755.4
  Top Layer w10: J2.B5@2707.32,3826.1 2848.9,3826.1 2870,3805 v1(3105,3805) ; v1(3155,4095) 3155,4096.35 3170,4111.35 3183.28,4111.35 R1.1@3185,4113.07
  Layer 3 w10: v1(3105,3805) 3105,3915 3130,3940 3130,3970 3155,3995 v1(3155,4095)
CHIP_EN: C13.1 R5.2 S2.1 U3.7 | length 1219.8
  Top Layer w10: C13.1@2981.93,4140 v1(3005,4140) 3039,4174 3039,4200 S2.1@3064,4225 ; U3.7@3741.26,3889.21 3741.57,3889.53 3764.14,3889.53 3770,3895.39 3770,3920.75 3793.07,3943.82 R5.2@3793.07,3945 3793.07,3945.84 3787.49,3951.42 3786.65,3951.42 3783.07,3955 v1(3750,3955)
  Layer 1 w10: v1(3005,4140) 3060,4140 3170,4030 3320,4030 3420,3930 3580,3930 3660,3850 3694.14,3850 3700,3855.86 3700,3925 3730,3955 v1(3750,3955)
FSPICLK: T6.2 U3.12 U4.8 U7.4 | length 1088.4
  Top Layer w8: U7.4@3237.24,3622.24 3267.24,3622.24 v1(3280,3635) ; v1(3403.5,3654.83) 3404.84,3656.17 3410.17,3656.17 T6.2@3420,3666 ; v1(3650,3990) 3654.84,3985.16 U3.12@3654.84,3936.26 ; U4.8@3755.39,4109.34 3757.11,4109.34 3760,4106.45 v1(3760,4005)
  Layer 2 w8: v1(3280,3635) 3280,3698.79 3421.21,3840 3585,3840 3655,3910 3655,3975 3651.34,3978.66 3651.34,3988.66 v1(3650,3990)
  Bottom Layer w8: v1(3280,3635) 3383.67,3635 v1(3403.5,3654.83) ; v1(3650,3990) 3745,3990 v1(3760,4005)
FSPID: T7.2 U3.13 U4.9 U7.3 | length 1039.5
  Top Layer w8: U7.3@3205.75,3622.24 3205.75,3640.75 v1(3215,3650) ; v1(3370,3655) 3371.34,3656.34 3375.34,3656.34 T7.2@3385,3666 ; v1(3635,3975) 3635.16,3974.84 U3.13@3635.16,3936.26 ; v1(3705,4005) 3706.34,4006.34 3706.34,4021.34 3736.17,4051.17 3736.17,4060.58 U4.9@3739.06,4063.47
  Layer 2 w8: v1(3215,3650) 3215,3690 3300,3775 3300,3800 3360,3860 3585,3860 3635,3910 v1(3635,3975)
  Bottom Layer w8: v1(3215,3650) 3365,3650 v1(3370,3655) ; v1(3635,3975) 3635,3995 3645,4005 v1@3700,4005
FSPINCS1: U3.16 U4.14 | length 244.3
  Top Layer w8: v1(3555,3955) 3561.8,3948.2 3574.79,3948.2 3576.1,3946.89 U3.16@3576.1,3936.26 ; v1(3585,4040) 3586.89,4040 3591.89,4045 3633.05,4045 3637.74,4049.69 3637.74,4060.58 U4.14@3640.63,4063.47
  Bottom Layer w8: v1(3555,3955) 3595,3955 3605,3965 3605,4020 v1(3585,4040)
FSPINCS2: R6.2 U3.14 U4.5 | length 388.2
  Top Layer w8: R6.2@3605,3983.07 R6.2@3605.3,3983.07 ; U3.14@3615.47,3936.26 3615.47,3972.9 R6.2@3605.3,3983.07 ; v1(3630,4010) 3630,4006.89 3606.18,3983.07 R6.2@3605.3,3983.07 ; U4.5@3699.68,4155.21 3699.84,4155.05 3699.84,4135.16 v1(3700,4135)
  Bottom Layer w8: v1@3635.36,4011.22 3636.22,4011.22 3660,4035 3700,4035 3725,4010 3740,4010 3755,4025 3755,4080 v1(3700,4135)
FSPINCS3: T3.2 U7.2 | length 346.8
  Top Layer w8: U7.2@3174.25,3622.24 3174.25,3659.25 v1(3180,3665) ; T3.2@3459,3665 3459.5,3665.5 3459.5,3679.5 v1(3460,3680)
  Bottom Layer w8: v1(3180,3665) 3313.45,3665 3328.45,3680 v1(3460,3680)
FSPINCS4: T5.2 U8.6 | length 133
  Top Layer w8: U8.6@3374.84,3601 3374.92,3600.92 3374.92,3585.08 v1(3375,3585) ; T5.2@3459,3640 3459.5,3639.5 3459.5,3625.5 v1(3460,3625)
  Bottom Layer w8: v1(3375,3585) 3415,3625 v1(3460,3625)
FSPIQ: R7.2 T8.2 U3.6 U4.10 U4.15 U7.5 | length 1484.1
  Top Layer w8: U7.5@3237.24,3527.76 3305,3595.51 3305,3625 3345,3665 3354,3665 T8.2@3355,3666 ; U4.15@3620.94,4063.47 3623.83,4066.36 3623.83,4076.94 3635,4088.11 v1(3635,4090) ; U4.10@3719.37,4063.47 3719.69,4063.79 3719.69,4089.69 v1(3720,4090) 3720,4110 3735,4125 3775,4125 3780,4120 v1(3780,4005) ; U3.6@3741.26,3869.53 3741.73,3870 3785,3870 3793.07,3878.07 ; R7.2@3795,3901.93 R7.2@3793.07,3900 3793.07,3878.07 ; v1(3855,3925) 3855,3885 3840,3870 3801.14,3870 3793.07,3878.07
  Top Layer w10: T8.2@3355,3666 3355,3670 3365,3680 3430,3680 3440,3690 v1(3440,3695)
  Layer 3 w10: v1(3440,3695) 3500,3755 3590,3755 3745,3910 3838.65,3910 3853.65,3925 v1(3855,3925)
  Bottom Layer w8: v1(3635,4090) v1(3720,4090) ; v1(3780,4005) 3780,3990 3790,3980 3790,3940 3805,3925 v1(3855,3925)
GND: C1.2 C2.2 C3.2 C4.2 C5.2 C6.2 C7.1 C8.1 C9.1 C10.1 C11.1 C12.1 C13.2 C14.2 C15.2 C16.1 C17.2 C18.2 C19.2 C20.2 C21.1 C22.2 C23.2 C24.2 C25.1 C26.1 J1.7 J2.A1/B12 J2.B1/A12 J2.S1 J2.S2 J2.S3 J2.S4 R1.2 R2.2 R4.2 S1.2 S2.2 U1.2 U2.2 U3.33 U4.2 U4.7 U5.B1 U5.B2 U5.C3 U6.4 U6.9 U7.1 U7.7 U8.3 U8.8 U8.9 U9.4 Y1.2 Y1.4 | length 4216.8
  Top Layer w8: U8.8@3334,3589.68 U8.9@3334,3570 3335,3569 3346,3569 3364.68,3550.32 U8.3@3396,3550.32 3410.32,3550.32 3426.63,3566.63 3445.45,3566.63 C22.2@3445.75,3566.93 3445.46,3566.93 3438.95,3573.43 3438.95,3573.73 3437.3,3575.39 3437.3,3592.7 v2(3435,3595) ; v2(3525,3510) 3527.3,3512.3 3527.3,3522.3 3530,3525 ; v1(3635,4030) 3648.07,4016.93 C9.1@3675,4016.93 ; C12.1@3643.07,4205 3641.85,4203.78 3641.85,4156.43 U4.2@3640.63,4155.21 3640.63,4131.26 3645,4126.89 v1(3645,4125) ; U3.33@3645,3840 3645,3855 v1(3670,3880) ; Y1.2@3671.93,3570.41 3674.27,3568.07 C8.1@3715,3568.07 ; v1(3700,4115) 3720,4135 3735,4135 3740,4140 3740,4154.26 U4.7@3739.06,4155.21 3739.06,4159.93 3741.94,4162.82 3743.56,4162.82 3761.93,4181.19 C11.1@3761.93,4205 ; C7.1@3715,3636.14 3716.18,3636.14 3740,3659.96 v1(3740,3685) ; v1(3780,3520) 3780.69,3520.69 3802.38,3520.69 C17.2@3803.07,3521.38 ; C15.2@3821.93,3646.38 3821.93,3646.67 3829.44,3654.19 3829.74,3654.19 3852.45,3676.9 3852.45,3694.38 C23.2@3858.07,3700 3858.07,3741.93 3855,3745
  Top Layer w10: U7.1@3142.76,3622.24 3142.76,3662.76 v1(3150,3670) ; U7.7@3174.25,3527.76 3174.63,3527.38 3174.63,3495.37 v1(3175,3495) ; C4.2@3370,4136.93 C14.2@3430,4136.93 ; C11.1@3761.93,4205 3800,4205 3805.86,4199.14 3805.86,4179.14 C24.2@3810,4175 3813.35,4171.65 3813.35,4123.46 U9.4@3814.25,4122.56 ; C17.2@3808.31,3524.23 3808.31,3543.31 3820,3555 U5.B1@3820,3568.5 U5.B2@3820,3584.25 U5.C3@3835.75,3600 3883.32,3600 C16.1@3885.25,3601.93 3885.25,3630.15 3886.69,3631.59 3886.69,3641.14 C18.2@3891.93,3646.38
  Top Layer w15: Y1.4@3564.72,3655.43 Y1.4@3562.76,3655.43 3560.79,3655.43 3520,3614.65 3520,3535 3530,3525 C19.2@3548.07,3525 3548.07,3503.79 3556.86,3495 3663.14,3495 3671.93,3503.79 C20.2@3671.93,3525 Y1.2@3671.93,3570.41
  Top Layer w20: S2.2@2865,4225 2865,4175 2900,4140 C13.2@2948.07,4140 ; C6.2@2973.86,3585 3040,3585 3060,3565 ; 3130,4145 3131.93,4146.93 R1.2@3185,4146.93 ; 3197.56,4147.56 3220,4170 3261.47,4170 ; U2.2@3275,4124.72 3273.19,4126.54 3273.19,4158.28 3261.47,4170 ; C3.2@3290,3718.07 3291.18,3718.07 3291.81,3717.44 3291.81,3716.26 3300,3708.07 v2(3300,3685) ; 3303.7,3718.7 3336.3,3751.3 3343.87,3751.3 R4.2@3344.5,3751.93 ; C4.2@3370,4136.93 C2.2@3370,4173.07 ; C2.2@3371.18,4173.07 C2.2@3370,4173.07 ; 3261.47,4170 3330,4170 3333.07,4173.07 C2.2@3370,4173.07
  Top Layer w50: J2.S4@2529.96,3693.82 J2.S2@2684.68,3693.82 2685.87,3695 2785,3695 ; J2.S3@2529.96,4096.18 J2.S1@2684.68,4096.18 2684.68,4099.72 2699.06,4114.09 2754.09,4114.09 2790,4150 ; v3(2785,3745) 2785,3695 ; v3(2845,4095) 2790,4150 ; S2.2@2865,4225 2790,4150 ; S1.2@3060,3500 3060,3565 3060,3615 2980,3695 2785,3695
  Layer 1 w8: v1(3635,4030) 3660,4030 3675,4015 3675,3950.95 3670,3945.95 v1(3670,3880)
  Bottom Layer w8: v2(3435,3595) 3520,3510 v2(3525,3510) ; v1(3645,4125) 3690,4125 v1(3700,4115) ; v1(3670,3880) 3690,3900 v1(3880,3900) ; v1(3740,3685) 3740,3595 3780,3555 v1(3780,3520)
INT_1: U5.A1
INT_BMP390: U3.8 U8.7 | length 677.6
  Top Layer w10: v1(3355,3585) 3355.16,3585.16 U8.7@3355.16,3601 ; U3.8@3741.26,3908.9 3744.68,3908.9 3745,3909.21 3745,3920 v1(3760,3935)
  Layer 1 w10: v1(3355,3585) 3420,3650 3474.14,3650 3480,3655.86 3480,3680 3510,3710 3510,3745 3565,3800 3695,3800 3745,3850 3745,3920 v1(3760,3935)
LNA_IN: C26.2 L3.2 U3.1 | length 110.7
  Top Layer w10.6: U3.1@3741.26,3771.1 L3.2@3851.94,3771.1
NetC4_1: C4.1 U2.4 | length 194.3
  Top Layer w20: U2.4@3312.4,4215.28 3312.4,4206.81 3314.21,4205 v2(3340,4205) ; v2(3340,4085) 3350.75,4085 3368.82,4103.07 C4.1@3370,4103.07
  Bottom Layer w20: v2(3340,4085) v2(3340,4205)
NetC16_2: C16.2 U5.C2 | length 56.2
  Top Layer w10: U5.C2@3835.75,3584.25 3855.75,3584.25 3870,3570 3883.32,3570 C16.2@3885.25,3568.07
NetC21_2: C21.2 C22.1 U8.1 U8.10 | length 248.9
  Top Layer w10: U8.10@3334,3550.32 3333.5,3550.32 3333.5,3549.82 3330,3546.32 3330,3505 3345,3490 C21.2@3383.07,3490 3385,3491.93 3385,3520 ; U8.1@3355.16,3539 3355.16,3525.86 3361.02,3520 3385,3520 ; C22.1@3445.75,3533.07 3444.23,3533.07 3431.16,3520 3385,3520
NetD1_C: D1.C R4.1 | length 62.8
  Top Layer w20: R4.1@3344.5,3718.07 3386.31,3718.07 3387.96,3719.72 3398.5,3719.72 D1.C@3404.25,3725.47
NetT2_1: T2.1 T3.1 U3.27 | length 192.4
  Top Layer w10: T3.1@3484,3665 T2.1@3510,3665 v1(3510,3685) ; v1(3600,3700) 3615.47,3715.47 U3.27@3615.47,3743.74
  Bottom Layer w10: v1(3510,3685) 3583.65,3685 3598.65,3700 v1(3600,3700)
NetT4_1: T4.1 T5.1 U3.28 | length 297.9
  Top Layer w10: T5.1@3484,3640 T4.1@3510,3640 3510,3638.65 3500,3628.65 v1(3500,3605) ; v1(3625,3705) 3635.16,3715.16 U3.28@3635.16,3743.74
  Bottom Layer w10: v1(3500,3605) 3545,3650 3610,3650 3625,3665 v1(3625,3705)
NetT6_1: T6.1 U8.2 | length 219.6
  Top Layer w8: U8.2@3374.84,3539 3419,3539 3430,3550 3465,3550 3470,3555 3470,3585 3445,3610 3445,3635 3440,3640 3421,3640 T6.1@3420,3641
NetT7_1: T7.1 U8.4 | length 99.5
  Top Layer w8: T7.1@3385,3641 3391,3635 3396,3635 3415,3616 3415,3580 3405,3570 U8.4@3396,3570
NetT8_1: T8.1 U8.5 | length 74.2
  Top Layer w8: T8.1@3355,3641 3371,3625 3381,3625 3396,3610 U8.5@3396,3589.68
NetT9_1: T9.1 U9.2 | length 45.8
  Top Layer w10: T9.1@3840,4024 3840,4045 3844.84,4049.84 3844.84,4066.54 U9.2@3845.75,4067.44
NetT10_1: T10.1 U9.1 | length 45.2
  Top Layer w10: T10.1@3810,4024 3810,4045 3813.35,4048.35 3813.35,4066.54 U9.1@3814.25,4067.44
NetU3_19: U3.19 U6.7 | length 370.7
  Top Layer w8: U6.7@3390.16,4024.21 3390.16,4070.16 3395,4075 v1(3425,4075) ; v1(3480,3885) 3495.47,3869.53 U3.19@3548.74,3869.53
  Bottom Layer w8: v1(3425,4075) 3425,3940 v1(3480,3885)
NetU3_20: U3.20 U6.3 | length 179.5
  Top Layer w8: U6.3@3409.84,3925.79 3411.75,3923.88 3411.75,3908.25 3420,3900 3445,3900 3495.16,3849.84 U3.20@3548.74,3849.84
NetU3_21: U3.21 U6.1 | length 239.4
  Top Layer w8: U6.1@3370.47,3925.79 3370.47,3895.18 v1(3385,3880.65) ; v1(3440,3885) 3494.84,3830.16 U3.21@3548.74,3830.16
  Bottom Layer w8: v1(3385,3880.65) 3385.35,3881 3404.5,3881 3408.5,3885 v1(3440,3885)
NetU3_22: U3.22 U6.6 | length 374.8
  Top Layer w8: U6.6@3409.84,4024.21 3409.92,4024.29 3409.92,4059.92 v1(3410,4060) ; v1(3510,3815) 3514.53,3810.47 U3.22@3548.74,3810.47
  Bottom Layer w8: v1(3410,4060) 3410,3920 3430,3900 3450.31,3900 3455,3895.31 3455,3870 v1(3510,3815)
NetU3_23: U3.23 U6.5 | length 344.7
  Top Layer w8: U6.5@3429.53,4024.21 3429.92,4024.61 3469.61,4024.61 v1(3470,4025) ; v1(3510,3790) 3510.39,3790.39 3548.35,3790.39 U3.23@3548.74,3790.79
  Bottom Layer w8: v1(3470,4025) 3522.5,3972.5 3522.5,3797.5 3515,3790 v1(3510,3790)
NetU3_24: U3.24 U6.2 | length 249.6
  Top Layer w8: U6.2@3390.16,3925.79 3390.16,3899.84 3490,3800 3490,3780 3498.9,3771.1 U3.24@3548.74,3771.1
SCL: R9.2 T9.2 U3.4 U5.A3 | length 661.1
  Top Layer w8: U3.4@3741.26,3830.16 3741.34,3830.08 3769.92,3830.08 v1(3770,3830) ; R9.2@3760,3601.93 3758.82,3601.93 3740,3620.75 3740,3645 3750,3655 3764.56,3655 ; v1(3770,3665) 3764.56,3659.56 3764.56,3655 ; U5.A3@3804.25,3600 3769.25,3635 3769.25,3650.31 3764.56,3655
  Top Layer w10: v1(3830,3975) 3830,3976.35 3840,3986.35 T9.2@3840,3999
  Layer 4 w10: v1(3770,3830) 3800,3830 3825,3855 3825,3970 v1(3830,3975)
  Bottom Layer w8: v1(3770,3665) 3785,3680 3785,3710 3715,3780 3715,3825 3720,3830 v1(3770,3830)
SDA: R8.2 T10.2 U3.5 U5.A2 | length 602.6
  Top Layer w8: U3.5@3741.26,3849.84 3741.34,3849.92 3769.92,3849.92 v1(3770,3850) ; v1(3755,3635) 3780,3610 3780,3590 3785.75,3584.25 U5.A2@3804.25,3584.25 ; v1(3765,3700) R8.2@3788.07,3700
  Top Layer w10: v1(3805,3975) 3805,3976.35 3810,3981.35 T10.2@3810,3999
  Layer 4 w10: v1(3770,3850) 3805,3885 v1(3805,3975)
  Bottom Layer w8: v1(3755,3635) 3755,3688.11 3765,3698.11 v1(3765,3700) 3705,3760 3705,3840 3715,3850 v1(3770,3850)
USB1_N: J2.A7 J2.B7 U1.6 | length 625.6
  Top Layer w10: J2.B7@2707.32,3924.53 2706.85,3925 2655.86,3925 2650,3919.14 2650,3895 2659.84,3885.16 J2.A7@2707.32,3885.16 3075.84,3885.16 3115,3846 3125.14,3846 3131,3840.14 3131,3834.6 3148,3817.6 U1.6@3156.25,3817.6
USB1_P: J2.A6 J2.B6 U1.4 | length 606.9
  Top Layer w10: v1(2660,3870) 2664.53,3865.47 J2.B6@2707.32,3865.47 ; v1(2670,3905) 2670.08,3904.92 2707.24,3904.92 J2.A6@2707.32,3904.84 3075.12,3904.84 3115.96,3864 3125.65,3864 3131.51,3869.86 3131.51,3875.91 3148,3892.4 U1.4@3156.25,3892.4
  Layer 3 w10: v1(2660,3870) 2660,3895 v1(2670,3905)
USB2_N: U1.1 U3.25 | length 495.9
  Top Layer w10.6: U1.1@3263.75,3817.6 3272,3817.6 3289.3,3834.9 3289.3,3841.99 3295.51,3848.2 3391.8,3848.2 3425,3815 3445,3795 3445,3760 3444.64,3759.64 3444.64,3745.84 v1(3443.8,3745) ; v1(3545,3705.2) 3544.16,3706.04 3540.64,3706.04 3538.55,3708.13 3535.73,3708.13 3531.2,3712.66 3531.2,3726.92 3539.28,3735 3553.95,3735 3561.1,3727.85 3570.84,3727.85 3576.1,3733.11 U3.25@3576.1,3743.74
  Bottom Layer w10.6: v1(3443.8,3745) 3445,3743.8 3445,3722.57 3461.17,3706.4 3535,3706.4 3535.36,3706.04 3544.16,3706.04 v1(3545,3705.2)
USB2_P: U1.3 U3.26 | length 472.8
  Top Layer w10.6: U1.3@3263.75,3892.4 3272,3892.4 3289.3,3875.1 3289.3,3868.01 3295.51,3861.8 3397.43,3861.8 3442.01,3817.23 3458.6,3800.63 3458.6,3760 3458.96,3759.64 3458.96,3745.84 v1(3459.8,3745) ; v1(3545,3721.2) 3545.84,3720.36 3549.36,3720.36 3555.46,3714.25 3576.93,3714.25 3595.79,3733.11 U3.26@3595.79,3743.74
  Bottom Layer w10.6: v1(3459.8,3745) 3459.8,3741.89 3458.6,3740.69 3458.6,3728.2 3466.8,3720 3535,3720 3535.36,3720.36 3544.16,3720.36 v1(3545,3721.2)
VBUS_FILTER: C2.1 C3.1 L2.1 U2.1 U2.3 | length 994.5
  Top Layer w20: v2(3215,4080) 3237.6,4080 ; U2.1@3237.6,4124.72 3237.6,4080 ; C3.1@3290,3751.93 3288.82,3751.93 3255.75,3785 3235,3785 3220,3800 3220,3918.28 3231.72,3930 3285,3930 3300,3945 3300,4028.28 3288.28,4040 3217.42,4040 L2.1@3215,4042.42 3227.91,4042.42 3237.6,4052.11 3237.6,4080 ; U2.3@3312.4,4124.72 3312.4,4081.72 3300.69,4070 3247.6,4070 3237.6,4080 ; C2.1@3370,4206.93 v2(3370,4230)
  Bottom Layer w20: v2(3215,4080) 3215,4135 3310,4230 v2(3370,4230)
VCC_5VMECHA: J1.10
VCC_VBUS: C1.1 J2.A4/B9 J2.B4/A9 L2.2 U1.5 | length 1083
  Top Layer w20: v2(2615,3950) 2639.87,3950 2677.55,3987.68 2705.51,3987.68 J2.A4/B9@2707.32,3989.49 ; v2(2650,3820) 2659.87,3820 2677.55,3802.32 2705.51,3802.32 J2.B4/A9@2707.32,3800.51 2819.49,3800.51 2868.07,3751.93 C1.1@3180,3751.93 3181.18,3751.93 3181.81,3752.56 3181.81,3769.04 3195,3782.23 3195,3843.28 3184.28,3854 ; U1.5@3156.25,3855 3157.25,3856 3183.28,3856 3195,3867.72 3195,3957.89 3198.4,3961.3 3208.72,3961.3 L2.2@3212.42,3965
  Top Layer w30: L2.2@3212.42,3965 L2.2@3215,3967.58
  Bottom Layer w20: v2(2615,3950) 2615,3855 v2(2650,3820)
VDD_SPI: C14.1 U3.18 U6.8 | length 481.6
  Top Layer w8: v1(3370,4055) 3370.24,4054.76 3370.24,4024.45 U6.8@3370.47,4024.21 ; v1(3505,3885) 3509.21,3889.21 U3.18@3548.74,3889.21
  Top Layer w10: v1(3370,4055) 3370.96,4055.96 3370.96,4070.96 3403.07,4103.07 C14.1@3430,4103.07
  Bottom Layer w8: v1(3370,4055) 3380,4055 3415,4090 3440,4090 3450,4080 3450,4000 3505,3945 v1(3505,3885)
XTAL_N: C19.1 U3.29 Y1.1 | length 274.6
  Top Layer w10: Y1.1@3564.72,3584.57 Y1.1@3565.28,3584.57 ; C19.1@3581.93,3525 3581.93,3567.91 Y1.1@3565.28,3584.57 ; U3.29@3654.84,3743.74 3654.84,3704.84 3640,3690 3625,3690 3610,3675 3610,3625 3600.36,3615.36 3599.46,3615.36 3568.66,3584.57 Y1.1@3565.28,3584.57
XTAL_P: C20.1 U3.30 Y1.3 | length 255.3
  Top Layer w10: C20.1@3638.07,3525 3638.07,3526.18 3615,3549.25 3615,3605 3635,3625 3635,3638.78 3651.65,3655.43 3655.28,3655.43 3655,3655.71 3655,3680 3674.53,3699.53 U3.30@3674.53,3743.74
pads on no net: A1.2 J1.1 J1.2 J1.3 J1.4 J1.5 J1.6 J1.8 J1.9 J1.11 J1.12 J1.13 J1.14 J1.15 J1.16 J1.17 J1.18 J1.19 J1.20 J2. J2.A8 J2.B8 J3.1 J3.2 J3.3 J3.4 J3.5 J3.6 J3.7 J3.8 J3.9 J3.10 J3.11 J3.12 J3.13 J3.14 J3.15 J3.16 J3.17 J3.18 J3.19 J3.20 U3.9 U4.1 U4.4 U4.6 U4.13

## Polygon pours and split planes (outlines as drawn)
GND on Top Layer "NONET_L01_P005" (solid, shelved, pour order 5): 3765,3400 3765,3761.04 3763.96,3760 2480,3760 2480,3580 2575,3580 cw(c2575,3480) 2675,3480 2675,3400
GND on Top Layer "NONET_L-01_P-001" (solid, shelved, pour order 0): 3980,3400 3980,4240 3765,4240 3765,3400
GND on Layer 1 "GND_L02_P004" (solid, pour order 4): 2810,3400 2810,3485 2675,3485 2675,3400
GND on Layer 1 "NONET_L02_P002" (solid, shelved, pour order 2): 2810,3485 2675,3485 ccw(c2580,3485) 2580,3580 2470,3580 cw(c2470,3605) 2445,3605 2445,4140 cw(c2545,4140) 2545,4240 2810,4240
GND on Layer 1 "NONET_L02_P001" (solid, shelved, pour order 1): 3980,3400 3980,4240 2810,4240 2810,3400
+3V3 on Layer 4 "NONET_L04_P003" (solid, shelved, pour order 3): 3980,3400 3980,4240 3475,4240 3475,4055 3080,4055 3080,3400

## Keep-outs
Keep-Out Layer: